# EAGLE board PCB (EAGLE 9.7.0)
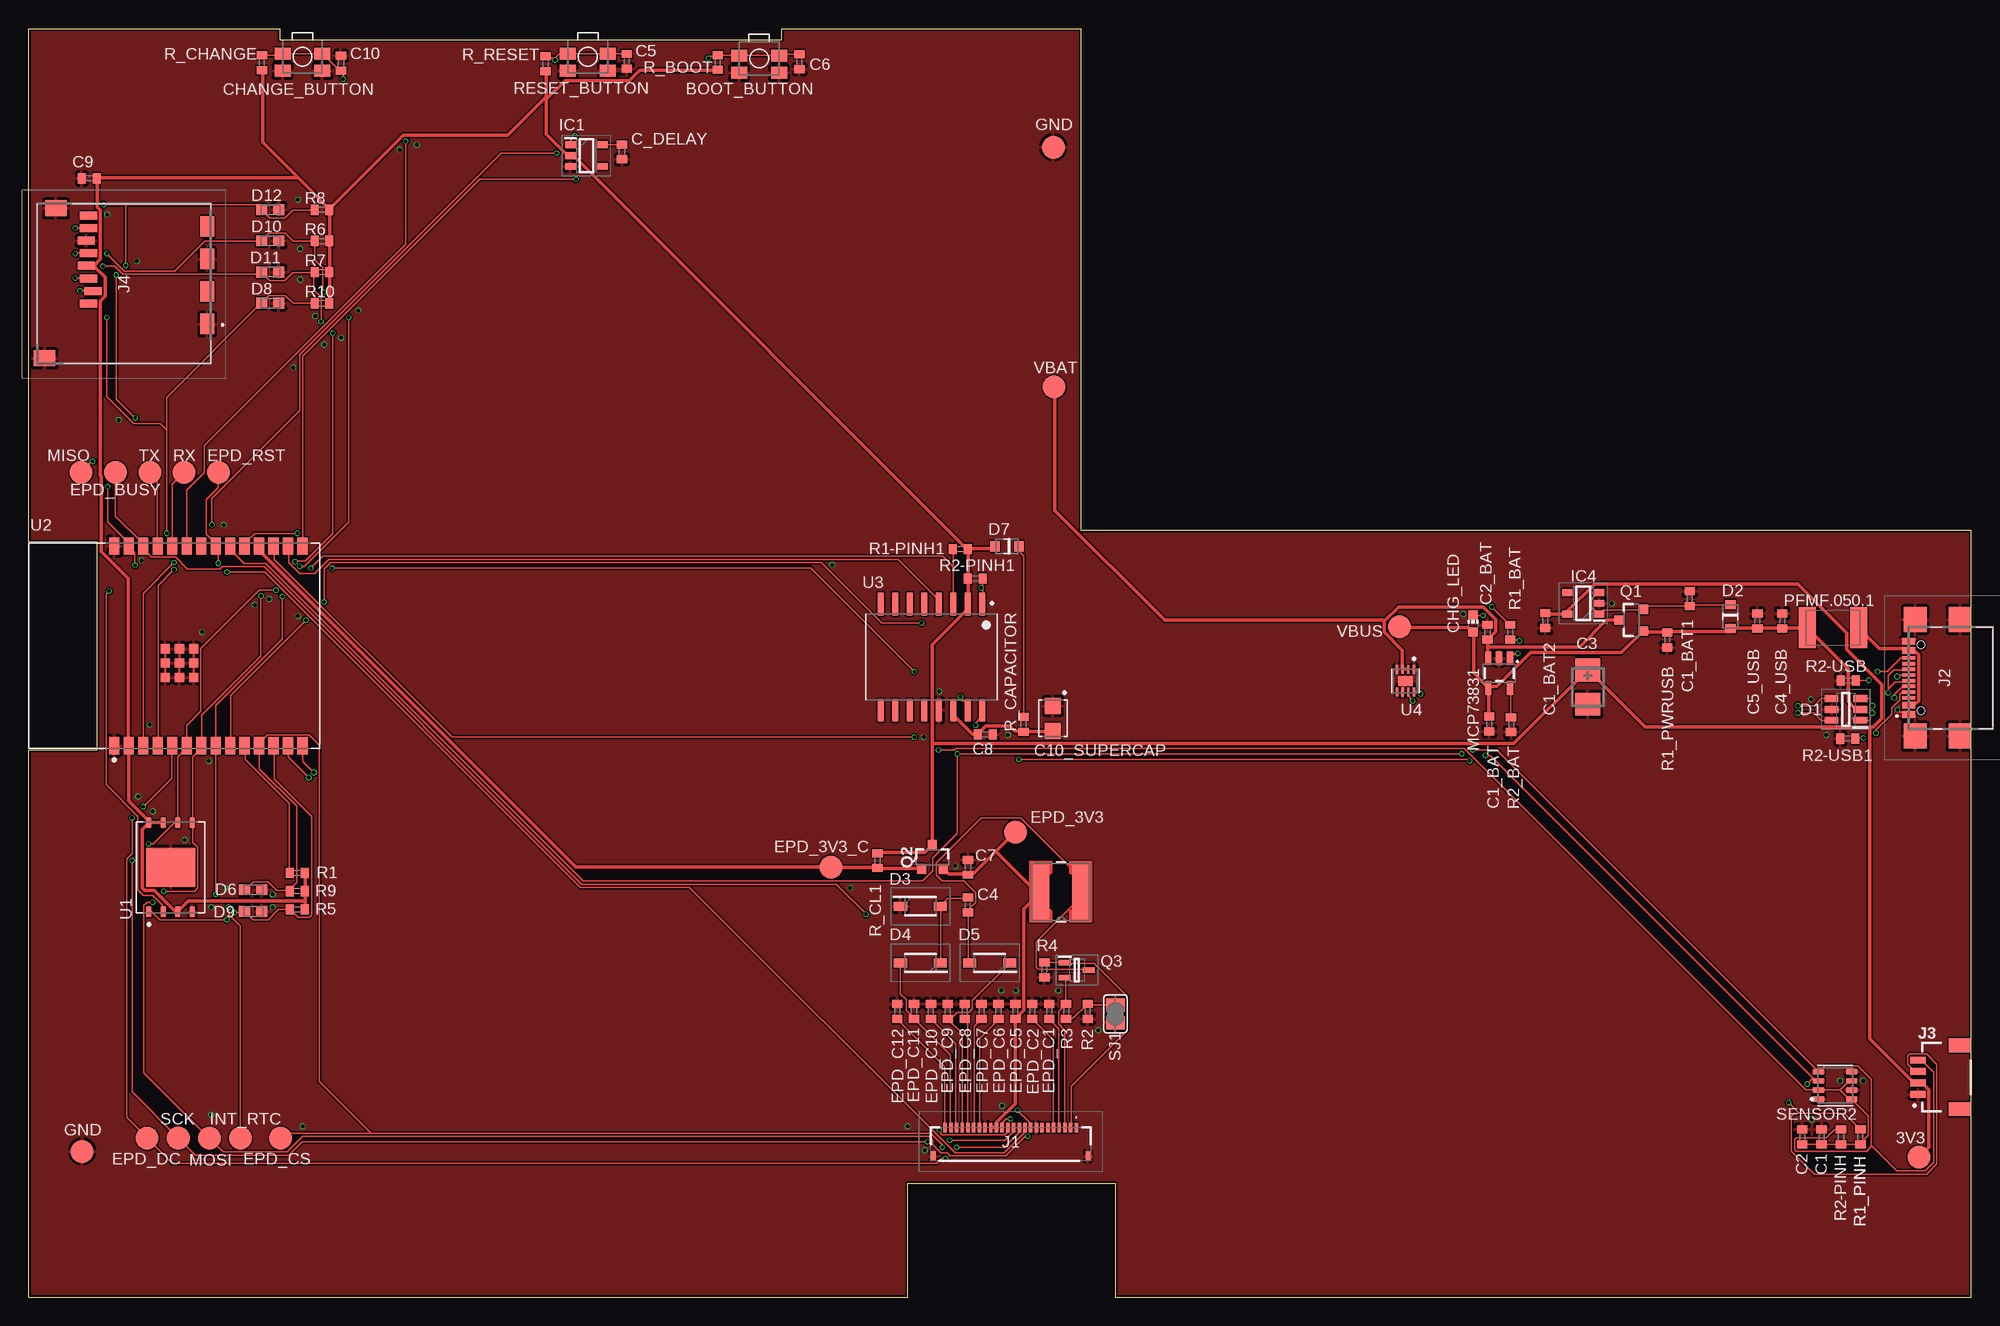
[diagram p0: board, top side]
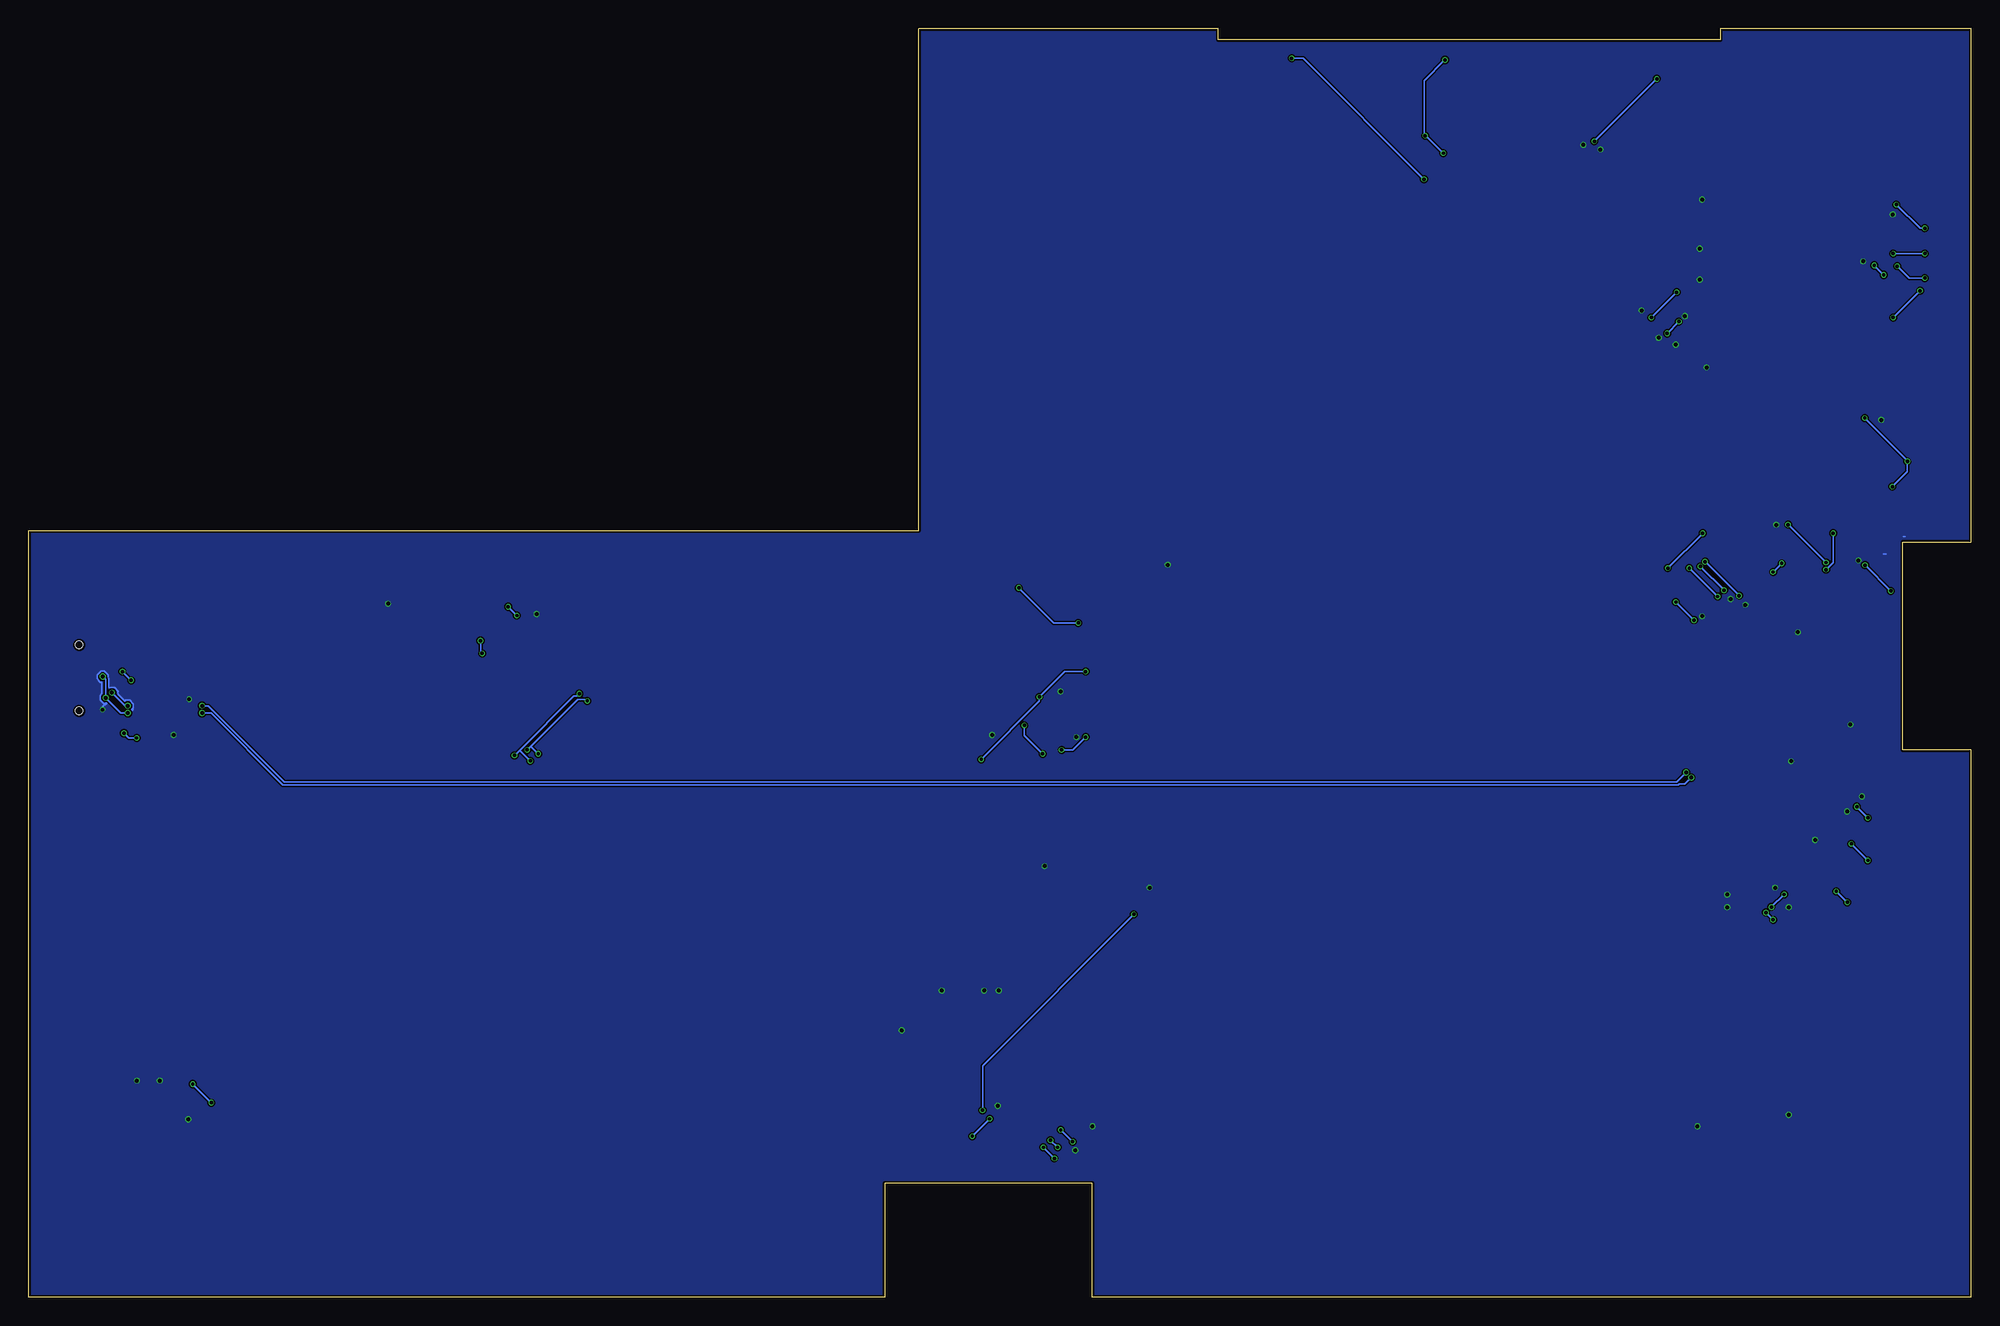
[diagram p1: board, bottom side, seen from below]

Size 170.2 x 111.2 mm. Coordinates in mm from the lower left corner, seen from the top.
Outline: 0,0 77,0 77,10 95.2,10 95.2,0 170.2,0 170.2,67.2 92.2,67.2 92.2,111.2 66,111.2 66,110.2 22,110.2 22,111.2 0,111.2 0,66.2 6,66.2 6,48 0,48 0,0
Copper layers (1*16): Top 0.035mm / dielectric 1.6mm / Bottom 0.035mm
Design rules "jlcpcb-2layers.dru *": minimum track width 0.15mm, minimum drill 0.3mm, track to track 5mil, track to pad 5mil, pad to pad 5mil, via to via 5mil, smd to smd 5mil, copper to edge 0.2mm, drill to drill 6mil, minimum pad ring 10mil, minimum via ring 3mil, stop-mask expansion 4mil, vias tented up to drill 0mil, thermal gap 10mil
Net classes: 1 power: width 0.3 mm

## Footprints (pad centres in the part's own frame; a part is rotated, then mirrored left to right if it is on the bottom)
MYBUTTON = smd 1.4 x 1.05: 1 1.75,1.258; 2 -1.75,1.258; 3 -1.75,-0.242; 4 1.75,-0.242
ESP32_WROVER_EAGLE-LTSPICE_C0402 = smd 0.7 x 0.9: 1 -0.65,0; 2 0.65,0
RCL_CT3528 = smd 2 x 2.2: + -1.5,0; - 1.5,0
CAPCP3225X100N = smd 1.4 x 1.4: 1 -1.1,0; 2 1.1,0
ADAFRUIT_CHIP-LED0603 = smd 0.8 x 0.8: A 0,-0.75; C 0,0.75
SOT95P280X145-6N = smd 1.2 x 0.6: 1 -1.25,0.95; 2 -1.25,0; 3 -1.25,-0.95; 4 1.25,-0.95; 5 1.25,0; 6 1.25,0.95
ESP32_WROVER_AVX---SD0805S020S1R0_AVX_SD0805S020S1R0_0 = smd 0.8 x 0.9: 1 -1.05,0; 2 1.05,0
SOD3716X135N = smd 1.15 x 0.8: 1 -1.75,0; 2 1.75,0
DIOC1608X36N = smd 0.97 x 0.94: 1 -0.75,0; 2 0.75,0
SOT95P280X125-5N = smd 0.9 x 0.6: 1 -1.4,0.95; 2 -1.4,0; 3 -1.4,-0.95; 4 1.4,-0.95; 5 1.4,0.95
SOT95P280X120-5N = smd 0.9 x 0.6: 1 -1.4,0.95; 2 -1.4,0; 3 -1.4,-0.95; 4 1.4,-0.95; 5 1.4,0.95
FH34SRJ24S05SH99 = smd 0.3 x 0.8: 1 5.75,1.45; 2 5.25,1.45; 3 4.75,1.45; 4 4.25,1.45; 5 3.75,1.45; 6 3.25,1.45; 7 2.75,1.45; 8 2.25,1.45; 9 1.75,1.45; 10 1.25,1.45; 11 0.75,1.45; 12 0.25,1.45; 13 -0.25,1.45; 14 -0.75,1.45; 15 -1.25,1.45; 16 -1.75,1.45; 17 -2.25,1.45; 18 -2.75,1.45; 19 -3.25,1.45; 20 -3.75,1.45; 21 -4.25,1.45; 22 -4.75,1.45; 23 -5.25,1.45; 24 -5.75,1.45 | smd 0.4 x 0.8: MP1 6.75,-1.05; MP2 -6.75,-1.05
SAMACSYS_PARTS_USB4110GFA = smd 0.3 x 1.15: A1 -3.35,3.678; A4 -2.55,3.678; A5 -1.25,3.678; A6 -0.25,3.678; A7 0.25,3.678; A8 1.25,3.678; A9 2.55,3.678; A12 3.35,3.678; B1 3.05,3.678; B4 2.25,3.678; B5 1.75,3.678; B6 0.75,3.678; B7 -0.75,3.678; B8 -1.75,3.678; B9 -2.25,3.678; B12 -3.05,3.678 | smd 2.18 x 2: MP1 -5.11,-0.827; MP2 5.11,-0.827; MP3 -5.11,3.103; MP4 5.11,3.103 | hole 0.65: -2.89,2.603; 2.89,2.603
JST04_1MM_RA = smd 0.6 x 1.35: 1 -1.5,0; 2 -0.5,0; 3 0.5,0; 4 1.5,0 | smd 1.2 x 2: NC1 2.8,-3.675; NC2 -2.8,-3.675
112ATAARR03ATTEND = smd 1.8 x 1.2: G1 10.6,10.4; G2 4.9,10.4; S1 7.75,10.4; S2 2.05,10.4 | smd 1.4 x 1.9: G3 13.6,-3.85; G4 0.45,-2.85 | smd 0.7 x 1.5: P1 8.8,0; P2 7.7,0.4; P3 6.6,0; P4 5.5,-0.2; P5 4.4,0; P6 3.3,-0.2; P7 2.2,0; P8 1.1,0
IND_4828-WE-TPC_WRE = smd 1.524 x 5.08: 1 -1.778,0; 2 1.778,0
ESP32_WROVER_SPARKFUN-IC-POWER_SOT23-5 = smd 0.55 x 1.2: 1 -0.95,-1.3; 2 0,-1.3; 3 0.95,-1.3; 4 0.95,1.3; 5 -0.95,1.3
ESP32C6_VARISTOR_CT/CN1812 = smd 1.5 x 3.6: 1 -2.25,0; 2 2.25,0
ESP32_WROVER_SPARKFUN-DISCRETESEMI_SOT23-3 = smd 0.8 x 0.9: 1 -0.95,-1; 2 0.95,-1; 3 0,1.1
SOT65P210X110-3N = smd 1.05 x 0.5: 1 -1.05,0.65; 2 -1.05,-0.65; 3 1.05,0
ESP32_WROVER_EAGLE-LTSPICE_R0402 = smd 0.7 x 0.9: 1 -0.65,0; 2 0.65,0
ESP32_WROVER_BME680_PSON80P300X300X100-8N = smd 1.016 x 0.5: 1 1.458,1.2; 2 1.458,0.4; 3 1.458,-0.4; 4 1.458,-1.2; 5 -1.458,-1.22; 6 -1.458,-0.4; 7 -1.458,0.4; 8 -1.458,1.2
SJ = smd 1.168 x 1.6: 1 -0.762,0; 2 0.762,0
TP20R = smd 2 x 2: TP 0,0
SON127P600X800X80-9N = smd 0.94 x 0.44: 1 -3.895,1.905; 2 -3.895,0.635; 3 -3.895,-0.635; 4 -3.895,-1.905; 5 3.895,-1.905; 6 3.895,-0.635; 7 3.895,0.635; 8 3.895,1.905 | smd 3.4 x 4.3: 9 0,0
XCVR_ESP32-C6-WROOM-1-N8 = smd 1.5 x 0.9: 1 -8.75,5.26; 2 -8.75,3.99; 3 -8.75,2.72; 4 -8.75,1.45; 5 -8.75,0.18; 6 -8.75,-1.09; 7 -8.75,-2.36; 8 -8.75,-3.63; 9 -8.75,-4.9; 10 -8.75,-6.17; 11 -8.75,-7.44; 12 -8.75,-8.71; 13 -8.75,-9.98; 14 -8.75,-11.25; 15 8.75,-11.25; 16 8.75,-9.98; 17 8.75,-8.71; 18 8.75,-7.44; 19 8.75,-6.17; 20 8.75,-4.9; 21 8.75,-3.63; 22 8.75,-2.36; 23 8.75,-1.09; 24 8.75,0.18; 25 8.75,1.45; 26 8.75,2.72; 27 8.75,3.99; 28 8.75,5.26 | smd 0.8 x 0.8: 29_1 -2.755,0.79; 29_2 -1.505,0.79; 29_3 -0.255,0.79; 29_4 -2.755,-0.46; 29_5 -1.505,-0.46; 29_6 -0.255,-0.46; 29_7 -2.755,-1.71; 29_8 -1.505,-1.71; 29_9 -0.255,-1.71
SOIC127P1032X265-16N = smd 2.05 x 0.59: 1 -4.655,4.445; 2 -4.655,3.175; 3 -4.655,1.905; 4 -4.655,0.635; 5 -4.655,-0.635; 6 -4.655,-1.905; 7 -4.655,-3.175; 8 -4.655,-4.445; 9 4.655,-4.445; 10 4.655,-3.175; 11 4.655,-1.905; 12 4.655,-0.635; 13 4.655,0.635; 14 4.655,1.905; 15 4.655,3.175; 16 4.655,4.445
SON50P200X200X80-9N = smd 0.76 x 0.27: 1 -0.985,0.75; 2 -0.985,0.25; 3 -0.985,-0.25; 4 -0.985,-0.75; 5 0.985,-0.75; 6 0.985,-0.25; 7 0.985,0.25; 8 0.985,0.75 | smd 0.9 x 1.3: 9 0,0

## Placement (x,y rotation side)
BOOT_BUTTON  BUTTON_CUSYOMV1  [MYBUTTON]  64,108.58 180 top
C1  100nF  [ESP32_WROVER_EAGLE-LTSPICE_C0402]  157.07,14.07 90 top
C1_BAT  4.7uF  [ESP32_WROVER_EAGLE-LTSPICE_C0402]  127.95,50.25 270 top
C1_BAT1  4.7uF  [ESP32_WROVER_EAGLE-LTSPICE_C0402]  145.53,61.25 90 top
C1_BAT2  4.7uF  [ESP32_WROVER_EAGLE-LTSPICE_C0402]  132.87,59.31 270 top
C2  100nF  [ESP32_WROVER_EAGLE-LTSPICE_C0402]  155.37,14.07 90 top
C2_BAT  4.7uF  [ESP32_WROVER_EAGLE-LTSPICE_C0402]  127.8,58.3 90 top
C3  100uF TANT  [RCL_CT3528]  136.6,53.49 270 top
C4  4.7uF/25V  [ESP32_WROVER_EAGLE-LTSPICE_C0402]  82.29,34.39 270 top
C4_USB  100nF  [ESP32_WROVER_EAGLE-LTSPICE_C0402]  153.63,59.29 90 top
C5  1uF  [ESP32_WROVER_EAGLE-LTSPICE_C0402]  52.41,108.32 270 top
C5_USB  4.7uF  [ESP32_WROVER_EAGLE-LTSPICE_C0402]  151.45,59.29 90 top
C6  100nF  [ESP32_WROVER_EAGLE-LTSPICE_C0402]  67.53,108.28 270 top
C7  10uF  [ESP32_WROVER_EAGLE-LTSPICE_C0402]  82.3,37.7 90 top
C8  100nF  [ESP32_WROVER_EAGLE-LTSPICE_C0402]  83.8,49.33 0 top
C9  100nF  [ESP32_WROVER_EAGLE-LTSPICE_C0402]  5.32,98.07 180 top
C10  100nF  [ESP32_WROVER_EAGLE-LTSPICE_C0402]  27.37,108.16 90 top
C10_SUPERCAP  CPH3225A  [CAPCP3225X100N]  89.74,50.74 270 top
C_DELAY  100nF  [ESP32_WROVER_EAGLE-LTSPICE_C0402]  51.99,100.39 270 top
CHANGE_BUTTON  BUTTON_CUSYOMV1  [MYBUTTON]  24,108.74 180 top
CHG_LED  [ADAFRUIT_CHIP-LED0603]  126.54,59.05 0 top
D1  USBLC6-2SC6Y  [SOT95P280X145-6N]  159.2,51.53 180 top
D2  ESP32_WROVER_AVX---SD0805S020S1R0_AVX_SD0805S020S1R0_0_0AVX_SD0805S020S1R0_0_0  [ESP32_WROVER_AVX---SD0805S020S1R0_AVX_SD0805S020S1R0_0]  149.08,59.66 270 top
D3  MBR0530  [SOD3716X135N]  78.13,34.28 0 top
D4  MBR0530  [SOD3716X135N]  78.13,29.32 180 top
D5  MBR0530  [SOD3716X135N]  84.19,29.32 180 top
D6  PGB1010603MR  [DIOC1608X36N]  19.67,35.73 180 top
D7  ESP32_WROVER_AVX---SD0805S020S1R0_AVX_SD0805S020S1R0_0_0AVX_SD0805S020S1R0_0_0  [ESP32_WROVER_AVX---SD0805S020S1R0_AVX_SD0805S020S1R0_0]  85.71,65.82 180 top
D8  PGB1010603MR  [DIOC1608X36N]  21.17,87.13 180 top
D9  PGB1010603MR  [DIOC1608X36N]  19.67,33.83 180 top
D10  PGB1010603MR  [DIOC1608X36N]  21.17,92.59 180 top
D11  PGB1010603MR  [DIOC1608X36N]  21.17,89.86 180 top
D12  PGB1010603MR  [DIOC1608X36N]  21.17,95.32 180 top
EPD_C1  1uF/50V  [ESP32_WROVER_EAGLE-LTSPICE_C0402]  89.41,25.08 270 top
EPD_C2  1uF/50V  [ESP32_WROVER_EAGLE-LTSPICE_C0402]  87.93,25.08 270 top
EPD_C5  0.1uF/50V  [ESP32_WROVER_EAGLE-LTSPICE_C0402]  86.45,25.08 270 top
EPD_C6  1uF/50V  [ESP32_WROVER_EAGLE-LTSPICE_C0402]  84.97,25.08 270 top
EPD_C7  1uF/50V  [ESP32_WROVER_EAGLE-LTSPICE_C0402]  83.49,25.08 270 top
EPD_C8  1uF/50V  [ESP32_WROVER_EAGLE-LTSPICE_C0402]  82.01,25.08 270 top
EPD_C9  1uF/50V  [ESP32_WROVER_EAGLE-LTSPICE_C0402]  80.53,25.08 270 top
EPD_C10  1uF/50V  [ESP32_WROVER_EAGLE-LTSPICE_C0402]  79.05,25.08 270 top
EPD_C11  1uF/50V  [ESP32_WROVER_EAGLE-LTSPICE_C0402]  77.57,25.08 270 top
EPD_C12  1uF/50V  [ESP32_WROVER_EAGLE-LTSPICE_C0402]  76.09,25.08 270 top
IC1  BD5229G-TR  [SOT95P280X125-5N]  48.87,100.07 0 top
IC4  XC6220A331MR-G  [SOT95P280X120-5N]  136.19,60.83 180 top
J1  FH34SRJ-24S-0.5SH_99_  [FH34SRJ24S05SH99]  86.04,13.44 0 top
J2  SAMACSYS_PARTS_USB4110-GF-A  [SAMACSYS_PARTS_USB4110GFA]  168.37,54.3 90 top
J3  QWIIC_RIGHT_ANGLE  [JST04_1MM_RA]  165.52,19.3 90 top
J4  112A-TAAR-R03_ATTEND  [112ATAARR03ATTEND]  5.25,95.9 270 top
L1  68uH  [IND_4828-WE-TPC_WRE]  90.43,35.55 180 top
MCP73831  ESP32_WROVER_SPARKFUN-IC-POWER_MCP73831  [ESP32_WROVER_SPARKFUN-IC-POWER_SOT23-5]  128.82,54.71 180 top
PFMF.050.1  ESP32C6_VARISTORCN1812  [ESP32C6_VARISTOR_CT/CN1812]  158.06,58.7 180 top
Q1  20V/4.2A/52mΩ/1.4W  [ESP32_WROVER_SPARKFUN-DISCRETESEMI_SOT23-3]  140.44,59.36 90 top
Q2  20V/4.2A/52mΩ/1.4W  [ESP32_WROVER_SPARKFUN-DISCRETESEMI_SOT23-3]  79.18,38.56 0 top
Q3  SI1308EDL-T1-GE3  [SOT65P210X110-3N]  91.84,28.68 0 top
R1  10k  [ESP32_WROVER_EAGLE-LTSPICE_R0402]  23.53,37.21 0 top
R1-PINH1  10k  [ESP32_WROVER_EAGLE-LTSPICE_R0402]  81.63,65.59 0 top
R1_BAT  200  [ESP32_WROVER_EAGLE-LTSPICE_R0402]  129.8,58.3 270 top
R1_PINH  10k  [ESP32_WROVER_EAGLE-LTSPICE_R0402]  160.47,14.07 270 top
R1_PWRUSB  100k  [ESP32_WROVER_EAGLE-LTSPICE_R0402]  143.56,57.62 90 top
R2  2.2  [ESP32_WROVER_EAGLE-LTSPICE_R0402]  92.79,25.08 90 top
R2-PINH  10k  [ESP32_WROVER_EAGLE-LTSPICE_R0402]  158.77,14.07 270 top
R2-PINH1  10k  [ESP32_WROVER_EAGLE-LTSPICE_R0402]  82.93,63.01 180 top
R2-USB  5k1  [ESP32_WROVER_EAGLE-LTSPICE_R0402]  159.4,54.07 180 top
R2-USB1  5k1  [ESP32_WROVER_EAGLE-LTSPICE_R0402]  159.37,48.97 0 top
R2_BAT  2k  [ESP32_WROVER_EAGLE-LTSPICE_R0402]  129.87,50.19 90 top
R3  0.47  [ESP32_WROVER_EAGLE-LTSPICE_R0402]  90.89,25.08 90 top
R4  10k  [ESP32_WROVER_EAGLE-LTSPICE_R0402]  88.99,28.72 90 top
R5  10k  [ESP32_WROVER_EAGLE-LTSPICE_R0402]  23.53,34.01 0 top
R6  10k  [ESP32_WROVER_EAGLE-LTSPICE_R0402]  25.71,92.58 0 top
R7  10k  [ESP32_WROVER_EAGLE-LTSPICE_R0402]  25.71,89.84 0 top
R8  10k  [ESP32_WROVER_EAGLE-LTSPICE_R0402]  25.71,95.31 0 top
R9  10k  [ESP32_WROVER_EAGLE-LTSPICE_R0402]  23.53,35.61 0 top
R10  10k  [ESP32_WROVER_EAGLE-LTSPICE_R0402]  25.71,87.11 0 top
R_BOOT  10k  [ESP32_WROVER_EAGLE-LTSPICE_R0402]  60.37,108.22 270 top
R_CAPACITOR  15  [ESP32_WROVER_EAGLE-LTSPICE_R0402]  87.16,50.22 90 top
R_CHANGE  10k  [ESP32_WROVER_EAGLE-LTSPICE_R0402]  20.44,108.21 270 top
R_CL1  10k  [ESP32_WROVER_EAGLE-LTSPICE_R0402]  74.37,38.28 90 top
R_RESET  10k  [ESP32_WROVER_EAGLE-LTSPICE_R0402]  45.29,108.11 270 top
RESET_BUTTON  BUTTON_CUSYOMV1  [MYBUTTON]  49,108.74 180 top
SENSOR2  ESP32_WROVER_BME680_BME680  [ESP32_WROVER_BME680_PSON80P300X300X100-8N]  158.26,18.58 180 top
SJ1  [SJ]  95.21,24.85 90 top
TP1  TPTP20R  [TP20R]  10.62,72.29 0 top
TP2  TPTP20R  [TP20R]  13.63,72.29 0 top
TP3  TPTP20R  [TP20R]  89.85,79.79 0 top
TP4  TPTP20R  [TP20R]  89.77,100.79 0 top
TP5  TPTP20R  [TP20R]  4.69,12.79 0 top
TP6  TPTP20R  [TP20R]  4.61,72.29 0 top
TP7  TPTP20R  [TP20R]  15.84,13.95 0 top
TP8  TPTP20R  [TP20R]  13.12,13.95 0 top
TP9  TPTP20R  [TP20R]  7.62,72.29 0 top
TP10  TPTP20R  [TP20R]  22.09,13.95 0 top
TP11  TPTP20R  [TP20R]  10.39,13.95 0 top
TP12  TPTP20R  [TP20R]  16.64,72.29 0 top
TP13  TPTP20R  [TP20R]  70.29,37.71 0 top
TP14  TPTP20R  [TP20R]  120.09,58.79 0 top
TP15  TPTP20R  [TP20R]  18.57,13.95 0 top
TP16  TPTP20R  [TP20R]  165.59,12.29 0 top
TP17  TPTP20R  [TP20R]  86.44,40.79 0 top
U1  W25Q512JVEIQ  [SON127P600X800X80-9N]  12.44,37.69 90 top
U2  ESP32-C6-WROOM-1-N8  [XCVR_ESP32-C6-WROOM-1-N8]  12.76,57.1 90 top
U3  DS3231SN#  [SOIC127P1032X265-16N]  79.1,56.12 270 top
U4  MAX17048G+T10  [SON50P200X200X80-9N]  120.62,54.03 270 top

## Library data of the parts
BOOT_BUTTON CHANGE_BUTTON CHG_LED PFMF.050.1 RESET_BUTTON SJ1 TP1-TP17 = tsc-good-lib
C1 C1_BAT C1_BAT1 C1_BAT2 C2 C2_BAT C4 C4_USB C5 C5_USB C6-C10 C_DELAY EPD_C1 EPD_C2 EPD_C5-EPD_C12 = tsc-good-lib; SPICEMODEL: NONE; SPICEPREFIX: C
C3 = tsc-good-lib; SPICEPREFIX: C
C10_SUPERCAP = tsc-good-lib; AVAILABILITY: Not in stock; CHECK_PRICES: https://www.snapeda.com/parts/CPH3225A/Seiko+Instruments/view-part/?ref=eda; DESCRIPTION: 11 mF (EDLC) Supercapacitor 3.3 V 1210 (3225 Metric) - -; MF: Seiko Instruments; MP: CPH3225A; PACKAGE: 1210 Seiko; PRICE: None; PURCHASE-URL: https://www.snapeda.com/api/url_track_click_mouser/?unipart_id=562593&manufacturer=Seiko Instruments&part_name=CPH3225A&search_term=None; SNAPEDA_LINK: https://www.snapeda.com/parts/CPH3225A/Seiko+Instruments/view-part/?ref=snap
D1 = tsc-good-lib; AVAILABILITY: In Stock; CHECK_PRICES: https://www.snapeda.com/parts/USBLC6-2SC6Y/STMicroelectronics/view-part/?ref=eda; DESCRIPTION: 17V Clamp 5A (8/20µs) Ipp Tvs Diode Surface Mount SOT-23-6; MF: STMicroelectronics; MP: USBLC6-2SC6Y; PACKAGE: SOT-23-6 STMicroelectronics; PRICE: None; SNAPEDA_LINK: https://www.snapeda.com/parts/USBLC6-2SC6Y/STMicroelectronics/view-part/?ref=snap
D2 D7 = tsc-good-lib; CENTROID_NOT_SPECIFIED: No; DATASHEET: http://datasheets.avx.com/schottky.pdf; DIGIKEY_DESCRIPTION: DIODE SCHOTTKY 20V 1A 0805; DIGIKEY_PART_NUMBER: 478-7800-1-ND; LEAD_FREE: yes; MF: AVX; MOUSER_PART_NUMBER: 581-SD0805S020S1R0; PACKAGE: 0805 (2012 metric); PREFIX: D; ROHS: yes; TEMPERATURE_RANGE_HIGH: +125°C; TEMPERATURE_RANGE_LOW: -55°C
D3-D5 = tsc-good-lib; AVAILABILITY: In Stock; CHECK_PRICES: https://www.snapeda.com/parts/MBR0530/Onsemi/view-part/?ref=eda; DESCRIPTION: Diode Schottky 30 V 500mA Surface Mount SOD-123; MF: ON Semiconductor; MP: MBR0530; PACKAGE: SOD-123-2 ON Semiconductor; PRICE: None; PURCHASE-URL: https://www.snapeda.com/api/url_track_click_mouser/?unipart_id=179458&manufacturer=ON Semiconductor&part_name=MBR0530&search_term=None; SNAPEDA_LINK: https://www.snapeda.com/parts/MBR0530/Onsemi/view-part/?ref=snap
D6 D8-D12 = tsc-good-lib; AVAILABILITY: In Stock; CHECK_PRICES: https://www.snapeda.com/parts/PGB1010603MR/Littelfuse/view-part/?ref=eda; DESCRIPTION: 150V (Typ) Clamp - Ipp Tvs Diode Surface Mount 0603 (1608 Metric); MF: Littelfuse Inc.; MP: PGB1010603MR; PACKAGE: 0603 Littelfuse Inc.; PRICE: None; PURCHASE-URL: https://www.snapeda.com/api/url_track_click_mouser/?unipart_id=5659453&manufacturer=Littelfuse Inc.&part_name=PGB1010603MR&search_term=None; SNAPEDA_LINK: https://www.snapeda.com/parts/PGB1010603MR/Littelfuse/view-part/?ref=snap
IC1 = tsc-good-lib; DESCRIPTION: Voltage Detector with Adjustable Delay Time: CMOS processes are utilized to develop high precision, low current consumption CMOS reset ICs that allow arbitrary setting of the delay time. The extensive lineup includes both Nch Open Drain and CMOS output types in a wide range of detection voltages (from 2.3V to 6.0V, in 0.1V steps), enabling selection of the ideal solution based on customer requirements. In addition, the entire series is of course both lead-free and RoHS-compliant.; HEIGHT: 1.25mm; MANUFACTURER_NAME: ROHM Semiconductor; MANUFACTURER_PART_NUMBER: BD5229G-TR; MOUSER_PART_NUMBER: 755-BD5229G-TR; MOUSER_PRICE-STOCK: https://www.mouser.co.uk/ProductDetail/ROHM-Semiconductor/BD5229G-TR?qs=4kLU8WoGk0vvnhrrYwdszw%3D%3D
IC4 = tsc-good-lib; DESCRIPTION: LDO Voltage Regulators; HEIGHT: 1.2mm; MANUFACTURER_NAME: Torex; MANUFACTURER_PART_NUMBER: XC6220A331MR-G; MOUSER_PART_NUMBER: 865-XC6220A331MR-G; MOUSER_PRICE-STOCK: https://www.mouser.co.uk/ProductDetail/Torex-Semiconductor/XC6220A331MR-G?qs=AsjdqWjXhJ8ZSWznL1J0gg%3D%3D
J1 = tsc-good-lib; DESCRIPTION: 24 Position FFC, FPC Connector Contacts, Top and Bottom 0.020" (0.50mm) Surface Mount, Right Angle; HEIGHT: 1.1mm; MANUFACTURER_NAME: Hirose; MANUFACTURER_PART_NUMBER: FH34SRJ-24S-0.5SH(99); MOUSER_PART_NUMBER: 798-FH34SRJ24S05SH99; MOUSER_PRICE-STOCK: https://www.mouser.co.uk/ProductDetail/Hirose-Connector/FH34SRJ-24S-0.5SH99?qs=vcbW%252B4%252BSTIpKBl5ap9J8Fw%3D%3D
J2 = tsc-good-lib; DESCRIPTION: CONN USB 2.0 TYPE-C R/A SMT; HEIGHT: 3.26mm; MANUFACTURER_NAME: GCT (GLOBAL CONNECTOR TECHNOLOGY); MANUFACTURER_PART_NUMBER: USB4110-GF-A; MOUSER_PART_NUMBER: 640-USB4110-GF-A; MOUSER_PRICE-STOCK: https://www.mouser.co.uk/ProductDetail/GCT/USB4110-GF-A?qs=KUoIvG%2F9IlYiZvIXQjyJeA%3D%3D
J3 = tsc-good-lib; PROD_ID: CONN-13694
J4 = tsc-good-lib; DESCRIPTION: Micro SD Card Socket, Push-Push Type, Top Mount, SMT, H=1.83mm, 10u; HEIGHT: 1.9mm; MANUFACTURER_NAME: ATTEND; MANUFACTURER_PART_NUMBER: 112A-TAAR-R03 ATTEND
L1 = tsc-good-lib; COPYRIGHT: Copyright (C) 2024 Ultra Librarian. All rights reserved.; CUSTOM_VAL: 68uH; MANUFACTURER_PART_NUMBER: 744043680; MFR_NAME: Wurth Electronics
MCP73831 = tsc-good-lib; PROD_ID: IC-09995
Q1 Q2 = tsc-good-lib; PROD_ID: TRAN-14388
Q3 = tsc-good-lib; AVAILABILITY: In Stock; CHECK_PRICES: https://www.snapeda.com/parts/SI1308EDL-T1-GE3/Vishay+Siliconix/view-part/?ref=eda; DESCRIPTION: Si1308EDL-T1-GE3 N-channel MOSFET Transistor, 1.5 A, 30 V, 3-Pin SC-70 | Siliconix / Vishay SI1308EDL-T1-GE3; MF: Vishay Siliconix; MP: SI1308EDL-T1-GE3; PACKAGE: SOT-323 Vishay Semiconductor; PRICE: None; PURCHASE-URL: https://www.snapeda.com/api/url_track_click_mouser/?unipart_id=274603&manufacturer=Vishay Siliconix&part_name=SI1308EDL-T1-GE3&search_term=None; SNAPEDA_LINK: https://www.snapeda.com/parts/SI1308EDL-T1-GE3/Vishay+Siliconix/view-part/?ref=snap
R1 R1-PINH1 R1_BAT R1_PINH R1_PWRUSB R2 R2-PINH R2-PINH1 R2-USB R2-USB1 R2_BAT R3-R10 R_BOOT R_CAPACITOR R_CHANGE R_CL1 R_RESET = tsc-good-lib; SPICEMODEL: NONE; SPICEPREFIX: R
SENSOR2 = tsc-good-lib; AVAILABILITY: Unavailable; DESCRIPTION: Integrated Environmental Unit; MF: Bosch Sensortec; MP: BME680; PACKAGE: LGA-8 Bosch Tools; PRICE: None
U1 = tsc-good-lib; AVAILABILITY: In Stock; CHECK_PRICES: https://www.snapeda.com/parts/W25Q512JVEIQ/Winbond+Electronics/view-part/?ref=eda; DESCRIPTION: FLASH - NOR Memory IC 512Mb (64M x 8) SPI - Quad I/O 133 MHz 8-WSON (8x6); MF: Winbond Electronics; MP: W25Q512JVEIQ; PACKAGE: Package; PRICE: None; SNAPEDA_LINK: https://www.snapeda.com/parts/W25Q512JVEIQ/Winbond+Electronics/view-part/?ref=snap
U2 = tsc-good-lib; AVAILABILITY: In Stock; CHECK_PRICES: https://www.snapeda.com/parts/ESP32-C6-WROOM-1-N8/Espressif+Systems/view-part/?ref=eda; DESCRIPTION: Multiprotocol Modules ESP32-C6 module, Wi-Fi 6 in 2.4 GHz band, Bluetooth 5, Zigbee 3.0 and Thread. ESP34-WROOM Compatible - ENGINEERING SAMPLE; MF: Espressif Systems; MP: ESP32-C6-WROOM-1-N8; PACKAGE: None; PRICE: None; SNAPEDA_LINK: https://www.snapeda.com/parts/ESP32-C6-WROOM-1-N8/Espressif+Systems/view-part/?ref=snap
U3 = tsc-good-lib; AVAILABILITY: In Stock; CHECK_PRICES: https://www.snapeda.com/parts/DS3231SN%23/Analog+Devices/view-part/?ref=eda; DESCRIPTION: Extremely Accurate I²C-Integrated RTC/TCXO/Crystal; MF: Analog Devices; MP: DS3231SN#; PACKAGE: SOIC-16 Maxim; PRICE: None; PURCHASE-URL: https://www.snapeda.com/api/url_track_click_mouser/?unipart_id=99048&manufacturer=Analog Devices&part_name=DS3231SN#&search_term=None; SNAPEDA_LINK: https://www.snapeda.com/parts/DS3231SN%23/Analog+Devices/view-part/?ref=snap
U4 = tsc-good-lib; AVAILABILITY: In Stock; CHECK_PRICES: https://www.snapeda.com/parts/MAX17048G+T10/Analog+Devices/view-part/?ref=eda; DESCRIPTION: 3µA 1-Cell/2-Cell Fuel Gauge with ModelGauge; MF: Analog Devices; MP: MAX17048G+T10; PACKAGE: TDFN-8 Maxim; PRICE: None; PURCHASE-URL: https://www.snapeda.com/api/url_track_click_mouser/?unipart_id=329239&manufacturer=Analog Devices&part_name=MAX17048G+T10&search_term=None; SNAPEDA_LINK: https://www.snapeda.com/parts/MAX17048G+T10/Analog+Devices/view-part/?ref=snap

## Nets
3V3 [power]: C1_BAT2.1 C3.+ C9.1 D7.2 IC1.2 IC4.5 J3.2 J4.P4 Q2.3 R1-PINH1.2 R1.2 R2-PINH1.2 R5.2 R6.2 R7.2 R8.2 R9.2 R10.2 R_BOOT.2 R_CHANGE.2 R_CL1.2 R_RESET.2 TP16.TP U1.3 U1.7 U1.8 U2.2 U3.2
32KHZ: R2-PINH1.1 U2.9 U3.1
D_N: D1.1 J2.A7 J2.B7
D_P: D1.3 J2.A6 J2.B6
EPD_3V3 [power]: C7.1 EPD_C5.2 J1.15 J1.16 L1.2 Q2.2 TP17.TP
EPD_3V3_C [power]: Q2.1 R_CL1.1 TP13.TP U2.18
EPD_BUSY: J1.9 TP9.TP U2.26
EPD_CS: D6.2 J1.12 R9.1 TP10.TP U2.11
EPD_DC: J1.11 TP11.TP U2.5
EPD_RST: J1.10 TP12.TP U2.21
FLASH_CS: D9.2 R5.1 U1.1 U2.12
GDR: J1.2 Q3.1 R4.2
GND: BOOT_BUTTON.1 BOOT_BUTTON.2 C1.2 C1_BAT1.2 C1_BAT2.2 C1_BAT.2 C2.2 C2_BAT.2 C3.- C4_USB.2 C5.2 C5_USB.2 C6.2 C7.2 C8.2 C9.2 C10.2 C10_SUPERCAP.1 C_DELAY.2 CHANGE_BUTTON.1 CHANGE_BUTTON.2 D1.5 D3.1 D6.1 D8.1 D9.1 D10.1 D11.1 D12.1 EPD_C1.1 EPD_C2.1 EPD_C5.1 EPD_C6.1 EPD_C7.1 EPD_C8.1 EPD_C9.1 EPD_C10.1 EPD_C11.1 EPD_C12.1 IC1.3 IC4.2 J1.8 J1.17 J1.MP1 J1.MP2 J2.A1 J2.A12 J2.B1 J2.B12 J2.MP1 J2.MP2 J2.MP3 J2.MP4 J3.1 J4.G1 J4.G2 J4.G3 J4.G4 J4.P6 MCP73831.2 R1_PWRUSB.1 R2-USB1.1 R2-USB.2 R2.1 R2_BAT.1 R4.1 RESET_BUTTON.1 RESET_BUTTON.2 SENSOR2.1 SENSOR2.5 SENSOR2.7 SJ1.1 TP4.TP TP5.TP U1.4 U1.9 U2.1 U2.28 U2.29_1 U2.29_2 U2.29_3 U2.29_4 U2.29_5 U2.29_6 U2.29_7 U2.29_8 U2.29_9 U3.13 U4.1 U4.4 U4.6 U4.9
GPIO8: R1.1 U2.10
I2C_PW: C1.1 C2.1 R1_PINH.2 R2-PINH.2 SENSOR2.2 SENSOR2.6 SENSOR2.8 U2.17
INT_RTC: R1-PINH1.1 TP15.TP U2.8 U3.3
IO/BOOT: BOOT_BUTTON.3 BOOT_BUTTON.4 C6.1 R_BOOT.1 U2.15
IO/CHANGE: C10.1 CHANGE_BUTTON.3 CHANGE_BUTTON.4 R_CHANGE.1 U2.23
MISO: D12.2 J4.P7 R8.1 TP6.TP U1.2 U2.27
MOSI: D11.2 J1.14 J4.P3 R7.1 TP7.TP U1.5 U2.7
N$1: J2.A5 R2-USB1.2
N$2: C1_BAT1.1 D2.1 IC4.1 IC4.3 Q1.2
N$3: C_DELAY.1 IC1.5
N$5: C4.1 D3.2 D4.1
N$6: MCP73831.1 R1_BAT.2
N$7: CHG_LED.C R1_BAT.1
N$8: MCP73831.5 R2_BAT.2
N$9: J2.B5 R2-USB.1
N$10: EPD_C1.2 J1.4
N$11: EPD_C2.2 J1.5
N$17: D7.1 R_CAPACITOR.2
N$20: EPD_C6.2 J1.18
N$21: EPD_C7.2 J1.19
N$22: EPD_C8.2 J1.20
N$24: EPD_C10.2 J1.22
N$26: EPD_C12.2 J1.24
PREVGH: D5.1 EPD_C9.2 J1.21
PREVGL: D4.2 EPD_C11.2 J1.23
RESE: J1.3 Q3.2 R3.2
RESE': R2.2 R3.1 SJ1.2
RESET: C5.1 IC1.1 R_RESET.1 RESET_BUTTON.3 RESET_BUTTON.4 U2.3
RTC_RST: U2.16 U3.4
RX: TP2.TP U2.24
SCK: D10.2 J1.13 J4.P5 R6.1 TP8.TP U1.6 U2.6
SCL: J3.4 R2-PINH.1 SENSOR2.4 U2.20 U3.16 U4.7
SDA: J3.3 R1_PINH.1 SENSOR2.3 U2.19 U3.15 U4.8
SRC: C4.2 D5.2 L1.1 Q3.3
SS_SD: D8.2 J4.P2 R10.1 U2.4
TX: TP1.TP U2.25
USB_D+_N: D1.6 U2.13
USB_D+_P: D1.4 U2.14
VBAT [power]: C2_BAT.1 MCP73831.3 Q1.3 TP3.TP U4.2 U4.3
VBUS [power]: C1_BAT.1 C4_USB.1 C5_USB.1 CHG_LED.A D1.2 D2.2 MCP73831.4 PFMF.050.1.2 Q1.1 R1_PWRUSB.2 TP14.TP
VRTC [power]: C8.1 C10_SUPERCAP.2 R_CAPACITOR.1 U3.14
VUSB [power]: J2.A4 J2.A9 J2.B4 J2.B9 PFMF.050.1.1

## Tracks (layer width: path | path; a pad name or v marks a point on that pad's centre or on a via)
3V3
  Top 0.3: TP16.TP 165.65,12.33 166.48,13.16 166.48,18.21 165.92,18.77 165.58,18.77 J3.2 165.37,18.84 165.09,18.84 161.28,22.64 161.28,49.86 161.21,50 | C1_BAT2.1 132.89,59.9 134.76,59.9 IC4.5 134.83,60.04 134.83,60.18 137.18,62.53 154.98,62.53 159.28,58.24 159.28,56.79 162.35,53.72 162.35,50.74 161.61,50 161.21,50 | 161.21,50 141.62,50 136.63,54.98 C3.+ 136.49,54.91 130.12,48.54 79.15,48.54 | R_CL1.2 74.37,38.99 78.53,38.99 79.15,39.61 Q2.3 79.15,39.75 79.15,48.54 | R1-PINH1.2 82.34,65.65 84.48,65.65 84.62,65.79 D7.2 | R1-PINH1.2 82.34,65.44 82.34,63.16 R2-PINH1.2 82.34,62.95 82.34,60.8 U3.2 82.2,60.66 82.2,60.25 79.15,57.2 79.15,48.54 | 24.24,34.76 24.24,35.59 R9.2 24.24,35.73 24.24,37.19 R1.2 | 24.24,34.76 24.24,34.07 R5.2 | U1.8 10.6,41.62 11.77,41.62 U1.7 | U1.8 10.46,41.48 9.97,41 9.97,35.87 10.18,35.66 11.01,35.66 12.81,33.86 13.02,33.86 U1.3 13.16,33.93 13.99,34.76 24.24,34.76 | U1.8 10.53,41.76 8.79,43.49 8.79,48.34 U2.2 8.73,48.48 8.73,63.02 6.37,65.37 6.37,71.95 6.3,72.02 6.3,87.32 6.72,87.74 6.72,89.4 5.82,90.3 5.75,90.44 | 45.36,105 45.36,105.22 42,101.87 32.83,101.87 26.45,95.5 R8.2 | 45.36,105 45.36,104.22 45.36,101.94 47.16,100.14 47.44,100.14 IC1.2 47.58,100 47.78,100 82.13,65.65 R1-PINH1.2 | 45.36,105 45.36,107.41 R_RESET.2 | R_BOOT.2 60.32,107.55 53.53,107.55 52.63,106.64 47,106.64 45.36,105 | 5.75,90.44 6.3,91 6.3,95.29 6.03,95.56 6.03,98.06 C9.1 6.16,98.13 23.61,98.13 | 5.75,90.44 5.05,90.44 J4.P4 | R10.2 26.38,87.12 26.38,89.82 R7.2 26.38,89.96 26.38,92.52 R6.2 26.38,92.73 26.38,95.29 R8.2 | 23.61,98.13 26.32,95.43 R8.2
  Top 0.3: 23.61,98.13 20.5,101.24 20.5,107.55 R_CHANGE.2
32KHZ  (via drill 0.3)
  Top 0.15: 83.58,62.19 83.58,60.8 U3.1 | 83.58,62.19 83.58,62.95 R2-PINH1.1 | v24.31,59.35 17.73,52.77 17.73,48.41 U2.9 | v25.9,60.94 25.9,63.85 26.45,64.4 69.46,64.4 74.74,59.12 v78.24,59.12 | v83.45,62.19 83.58,62.19
  Bottom 0.15: v25.9,60.94 v24.31,59.35 | v78.24,59.12 80.38,59.12 v83.45,62.19
D_N  (via drill 0.35)
  Top 0.15: D1.1 161.35,50.58 161.35,51.06 v161.5,51.22 | J2.B7 164.16,53.55 163.44,52.83 v163.44,52.55 | v163.71,54.41 163.85,54.55 J2.A7
  Bottom 0.15: v161.5,51.22 162.1,51.22 v163.44,52.55 163.44,54.14 v163.71,54.41
D_P  (via drill 0.35)
  Top 0.15: D1.3 161.35,52.48 161.35,51.99 v161.5,51.84 | J2.A6 164.56,53.92 163.52,53.92 162.9,53.3 | 162.9,53.3 v162.9,53 | J2.B6 164.65,55 163.4,55 162.9,54.5 162.9,53.3
  Bottom 0.15: v161.5,51.84 161.75,51.84 v162.9,53
EPD_3V3
  Top 0.3: Q2.2 80.19,37.53 80.61,37.12 82.27,37.12 C7.1 82.41,37.19 82.82,37.19 84.73,39.09 | 84.73,39.09 86.42,40.79 TP17.TP | J1.16 84.35,14.89 84.76,14.89 J1.15 84.83,15.03 84.83,15.37 86.42,16.97 86.42,24.38 EPD_C5.2 86.56,24.52 87.19,25.14 87.19,34.07 88.64,35.52 L1.2 88.36,35.46 84.73,39.09
EPD_3V3_C
  Top 0.3: Q2.1 78.18,37.6 74.37,37.6 R_CL1.1 74.24,37.67 70.43,37.67 TP13.TP 70.29,37.74 47.92,37.74 20.22,65.44 20.22,65.79 U2.18
EPD_BUSY  (via drill 0.3)
  Top 0.15: v86.63,16.41 87.74,15.3 87.74,14.96 J1.9 | TP9.TP 7.62,68.49 9.97,66.13 9.97,65.86 U2.26 10.04,65.79 10.04,65.58 10.73,64.89 12.88,64.89 13.92,63.85 16.76,63.85 16.97,64.06 20.64,64.06 48.48,36.22 70.77,36.22 73.37,33.62 v73.37,33.57
  Bottom 0.15: v86.63,16.41 86.63,20.31 v73.37,33.57
EPD_CS  (via drill 0.3)
  Top 0.15: D6.2 18.97,35.73 19.67,36.42 20.98,36.42 21.74,35.66 22.85,35.66 R9.1 22.85,35.73 23.48,36.36 23.48,43.07 20.22,46.33 20.22,48.34 U2.11 20.22,48.41 20.22,48.61 20.91,49.31 24.58,49.31 25.48,48.41 25.48,18.92 30,14.4 | v80.68,13.78 85.52,13.78 86.28,14.54 J1.12 | v80.05,13.16 80.05,13.37 79.01,14.4 30,14.4 | 30,14.4 22.51,14.4 22.09,13.99 TP10.TP
  Bottom 0.15: v80.05,13.16 v80.68,13.78
EPD_DC  (via drill 0.3)
  Top 0.15: v81.3,13.16 85.45,13.16 86.77,14.47 86.77,14.89 J1.11 | v80.33,12.19 79.98,12.19 79.57,11.77 12.6,11.77 10.46,13.92 TP11.TP 10.39,13.99 8.59,15.79 8.59,38.43 9.07,38.92 v9.07,42.03 | v10.04,43 12.53,45.5 12.53,48.34 U2.5
  Bottom 0.15: v80.33,12.19 v81.3,13.16 | v9.07,42.03 v10.04,43
EPD_RST  (via drill 0.3)
  Top 0.15: v17.38,63.57 20.71,63.57 48.34,35.94 57.89,35.94 81.16,12.67 85.45,12.67 87.25,14.47 87.25,14.89 J1.10 | v16.62,64.33 16.62,65.58 16.41,65.79 U2.21 16.34,65.86 16.34,66.13 15.58,66.89 15.58,69.94 16.62,70.98 16.62,72.23 TP12.TP
  Bottom 0.15: v16.62,64.33 v17.38,63.57
FLASH_CS  (via drill 0.3)
  Top 0.15: v17.38,33.1 11.49,33.1 10.8,33.79 10.6,33.79 U1.1 | v18,33.73 18.97,33.73 D9.2 18.97,33.79 19.67,33.1 20.98,33.1 21.88,34 22.85,34 R5.1 22.92,34 23.61,33.31 24.58,33.31 24.79,33.52 24.79,42.17 21.54,45.43 21.54,48.34 U2.12
  Bottom 0.15: v18,33.73 v17.38,33.1
GDR
  Top 0.15: J1.2 91.34,14.96 91.34,18.49 96.26,23.41 96.26,26.38 93.35,29.29 90.86,29.29 Q3.1 90.79,29.36 89.06,29.36 R4.2
GND  (via drill 0.3, 0.35)
  Top 0.15: U2.29_6 13.23,56.78 13.23,55.61 U2.29_5 U2.29_4 | v163.71,51.52 163.91,51.31 164.68,51.31 J2.B12 | D1.5 | U2.29_3 U2.29_2 U2.29_1 | U2.29_9 U2.29_8 U2.29_7
  Bottom 0.15: v163.71,51.52 163.71,51.8 163.43,52.08 163.36,52.08 163.36,52.01 163.43,52.01 163.5,51.94 163.91,52.35 163.91,52.77 163.78,52.91 163.78,53.95 163.84,53.95 163.84,53.88 163.91,53.88 164.05,54.02 164.05,54.08 164.19,54.22 164.19,54.57 163.84,54.91 163.57,54.91 163.22,54.57 163.22,54.36 163.15,54.29 163.15,53.46 162.67,53.46 162.32,53.12 162.39,53.05 162.39,52.91 162.32,52.91 162.32,52.84 161.77,52.28 161.7,52.35 161.35,52.35 161.01,52.01 161.01,51.66 161.15,51.52 161.08,51.45 161.01,51.52 | 5.96,66.69 5.82,66.69 | 7.73,65.16 7.48,65.16
  other vias: 156.13,52.42 77,15 24,15 16,16 78.4,49.1 28.9,86.5 32.5,100.6 34,101 17.1,67.7 25.9,83.5 9.5,90.8 6.9,94.9 7.9,76.9 19.8,60.7 15.2,58.3 25.1,86 21.4,34.2 16,34.2 21.4,35.3 81.2,37.8 72,35.9 9.9,64.6 157.5,49.3 23.8,91.9 23.8,89.2 23.6,96.2 85.3,16.8 78.5,12.9 13.7,40.1 138.7,60.8 93.7,23.4 90.2,26.9 86.5,26.9 85.2,26.9 160.7,19 158.7,19 156.2,15.6 125.7,59.9 85.8,49.3 79.8,53.1 70.4,64.2 17.2,35.9 10.9,42.6 9.6,43.9 15.8,47 10.6,50.2 21.1,61.2 23.6,59.7 23.2,81.5 27.4,84.1
  pour Top: 6.06,47.96 6.04,47.94 6.02,47.92 0.08,47.92 0.08,0.08 76.92,0.08 76.92,10.02 76.94,10.04 76.96,10.06 76.98,10.08 95.22,10.08 95.24,10.06 95.26,10.04 95.28,10.02 95.28,0.08 170.12,0.08 170.12,67.12 92.18,67.12 92.16,67.14 92.14,67.16 92.12,67.18 92.12,111.12 66.08,111.12 66.08,110.18 66.06,110.16 66.04,110.14 66.02,110.12 21.98,110.12 21.96,110.14 21.94,110.16 21.92,110.18 21.92,111.12 0.08,111.12 0.08,66.28 6.02,66.28 6.04,66.26 6.06,66.24 6.08,66.22 6.08,47.98
  pour Bottom: 6.06,47.96 6.04,47.94 6.02,47.92 0.08,47.92 0.08,0.08 76.92,0.08 76.92,10.02 76.94,10.04 76.96,10.06 76.98,10.08 95.22,10.08 95.24,10.06 95.26,10.04 95.28,10.02 95.28,0.08 170.12,0.08 170.12,67.12 92.18,67.12 92.16,67.14 92.14,67.16 92.12,67.18 92.12,111.12 66.08,111.12 66.08,110.18 66.06,110.16 66.04,110.14 66.02,110.12 21.98,110.12 21.96,110.14 21.94,110.16 21.92,110.18 21.92,111.12 0.08,111.12 0.08,66.28 6.02,66.28 6.04,66.26 6.06,66.24 6.08,66.22 6.08,47.98
GPIO8
  Top 0.15: R1.1 22.85,37.26 22.85,43.28 18.97,47.16 18.97,48.34 U2.10
I2C_PW  (via drill 0.3)
  Top 0.15: C2.1 155.4,13.43 157.06,13.43 C1.1 157.13,13.43 158.72,13.43 R2-PINH.2 158.79,13.43 160.45,13.43 R1_PINH.2 160.45,13.5 161.15,14.2 161.15,15.93 159.76,17.31 SENSOR2.8 159.69,17.38 159.48,17.38 158.72,18.14 158.72,18.21 | 158.72,18.21 156.85,18.21 SENSOR2.2 156.78,18.21 155.67,18.21 125.76,48.13 81.23,48.13 81.09,47.99 v79.71,47.99 | 158.72,18.21 159.48,18.97 159.69,18.97 SENSOR2.6 | v77.6,49.1 37.12,49.1 21.54,64.68 21.54,65.79 U2.17
  Bottom 0.15: v79.71,47.99 78.71,47.99 v77.6,49.1
INT_RTC  (via drill 0.3)
  Top 0.15: 81.02,64 81.02,60.8 U3.3 | 81.02,64 81.02,64.96 81.02,65.58 R1-PINH1.1 | v16.41,35.32 16.41,48.34 U2.8 16.41,48.41 16.41,51.87 22.23,57.69 v22.23,61.42 | v17.52,34.21 17.52,33.59 18.56,32.55 18.56,13.99 TP15.TP | v24.72,63.92 25.76,64.96 80,64.96 80.07,64.96 81.02,64
  Bottom 0.15: v17.52,34.21 v16.41,35.32 | v22.23,61.42 v24.72,63.92
IO/BOOT  (via drill 0.3)
  Top 0.15: C6.1 65.86,108.93 65.79,108.86 BOOT_BUTTON.3 65.72,108.86 62.26,108.86 BOOT_BUTTON.4 62.19,108.86 60.39,108.86 R_BOOT.1 60.39,108.79 59.76,108.79 v59.55,108.58 | v47.96,97.99 39.54,97.99 24.03,82.48 24.03,65.86 U2.15
  Bottom 0.15: v59.55,108.58 58.55,108.58 v47.96,97.99
IO/CHANGE  (via drill 0.3)
  Top 0.15: R_CHANGE.1 20.5,108.86 22.16,108.86 22.23,108.93 CHANGE_BUTTON.4 22.3,109 25.69,109 CHANGE_BUTTON.3 25.76,109 27.21,107.55 27.35,107.55 C10.1 27.42,107.48 27.56,107.34 v27.56,106.78 | U2.23 13.85,70.77 15.37,72.3 15.37,74.65 33.03,92.31 v33.03,101.31
  Bottom 0.15: v27.56,106.78 v33.03,101.31
MISO  (via drill 0.3)
  Top 0.15: R8.1 25,95.29 23.13,95.29 22.44,94.6 21.12,94.6 20.43,95.29 D12.2 20.36,95.36 19.94,95.77 8.52,95.77 | v4.09,93.69 5.19,93.69 J4.P7 | 8.52,95.77 v6.58,95.77 | v7.06,61.92 6.79,61.64 6.79,44.94 9.56,42.17 9.56,35.73 10.04,35.25 10.87,35.25 11.77,34.35 11.77,33.86 U1.2 | v9.32,64.18 9.32,65.29 U2.27 8.73,65.86 8.73,66.13 6.92,67.93 v6.92,71.05 | v9.32,64.18 | v5.61,73.27 5.54,73.27 5.33,73.06 5.33,72.99 4.64,72.3 TP6.TP | v8.52,90.44 8.52,95.77 | v7.69,89.61 7.69,78.74 v9.35,77.08
  Bottom 0.15: v4.09,93.69 4.5,93.69 v6.58,95.77 | v9.32,64.18 v7.06,61.92 | v6.92,71.05 5.61,72.37 v5.61,73.27 5.61,73.34 v9.35,77.08 | v7.69,89.61 v8.52,90.44
MOSI  (via drill 0.3)
  Top 0.15: v4.09,89.33 5.19,89.33 J4.P3 | v6.51,90.37 7.55,90.37 8.24,89.68 20.22,89.68 20.36,89.82 D11.2 20.43,89.82 21.12,89.12 22.44,89.12 23.13,89.82 25,89.82 R7.1 25,89.75 25,88.29 25.62,87.67 v25.62,85.52 | v86.01,15.65 85.66,15.65 85.32,15.3 85.32,14.96 J1.14 | v87.53,14.13 87.32,14.13 85.59,12.4 80.75,12.4 80.47,12.67 79.92,12.67 79.22,13.37 79.22,13.78 78.88,14.13 24.03,14.13 22.64,12.74 17.04,12.74 15.86,13.92 TP7.TP 15.79,13.99 10.11,19.67 10.11,34.35 10.39,34.62 v10.87,34.62 | v11.84,35.59 14.54,35.59 14.82,35.87 14.82,39.47 14.4,39.89 14.4,41.55 U1.5 14.4,41.62 14.4,47.37 15.1,48.06 15.1,48.34 U2.7 15.17,48.41 15.17,51.04 20.36,56.23 v20.36,61.49 | v26.66,84.48 26.66,66.97 24.24,64.54 23.41,64.54 v23.34,64.47
  Bottom 0.15: v4.09,89.33 5.47,89.33 v6.51,90.37 | v87.53,14.13 v86.01,15.65 | v10.87,34.62 v11.84,35.59 | v26.66,84.48 v25.62,85.52 | v20.36,61.49 v23.34,64.47
N$1  (via drill 0.3)
  Top 0.15: v160.73,49.03 160.04,49.03 R2-USB1.2 | v161.84,49.44 161.84,49.72 163.22,51.11 163.22,51.66 163.91,52.35 163.91,52.84 164.12,53.05 164.68,53.05 J2.A5
  Bottom 0.15: v160.73,49.03 161.42,49.03 v161.84,49.44
N$2
  Top 0.15: D2.1 149.03,60.66 145.56,60.66 C1_BAT1.1 145.49,60.59 141.75,60.59 141.48,60.32 Q1.2 141.41,60.25 137.95,60.25 137.6,59.9 IC4.1 137.53,59.9 137.12,60.32 137.05,60.32 136.91,60.45 136.91,61.22 137.53,61.84 IC4.3
N$3
  Top 0.15: IC1.5 50.28,101.04 51.94,101.04 C_DELAY.1
N$5
  Top 0.15: C4.1 82.27,34.97 80.54,34.97 79.92,34.35 D3.2 79.92,34.28 79.92,29.36 D4.1
N$6  (via drill 0.3)
  Top 0.15: v130.61,57.55 130.54,57.62 129.84,57.62 R1_BAT.2 | v130.47,56.44 130.19,56.44 129.77,56.02 MCP73831.1
  Bottom 0.15: v130.61,57.55 130.61,56.58 v130.47,56.44
N$7  (via drill 0.3)
  Top 0.15: v127.42,59.76 126.59,59.76 CHG_LED.C | v128.18,60.52 129.77,58.93 R1_BAT.1
  Bottom 0.15: v128.18,60.52 v127.42,59.76
N$8
  Top 0.15: R2_BAT.2 129.84,50.9 129.84,53.32 129.77,53.39 MCP73831.5
N$9  (via drill 0.3)
  Top 0.15: v161.21,54.08 160.11,54.08 R2-USB.1 | v161.98,54.85 162.81,54.85 163.98,56.02 164.68,56.02 J2.B5
  Bottom 0.15: v161.98,54.85 v161.21,54.08
N$10
  Top 0.15: J1.4 90.23,14.96 90.23,23.55 89.4,24.38 EPD_C1.2
N$11
  Top 0.15: J1.5 89.75,14.96 89.75,22.58 87.95,24.38 EPD_C2.2
N$17
  Top 0.15: R_CAPACITOR.2 87.19,50.9 87.19,64.96 86.91,65.23 86.91,65.65 86.77,65.79 D7.1
N$20
  Top 0.15: J1.18 83.31,14.96 83.31,22.71 84.97,24.38 EPD_C6.2
N$21
  Top 0.15: J1.19 82.82,14.96 82.82,23.75 83.45,24.38 EPD_C7.2
N$22
  Top 0.15: J1.20 82.27,14.96 82.27,24.17 82.06,24.38 EPD_C8.2
N$24
  Top 0.15: J1.22 81.23,14.96 81.23,22.23 79.08,24.38 EPD_C10.2
N$26
  Top 0.15: J1.24 80.26,14.96 80.26,20.22 76.11,24.38 EPD_C12.2
PREVGH
  Top 0.15: J1.21 81.78,14.96 81.78,23.13 80.54,24.38 EPD_C9.2 80.68,24.31 81.37,25 82.41,25 82.68,25.28 82.68,26.04 85.94,29.29 D5.1
PREVGL
  Top 0.15: J1.23 80.75,14.96 80.75,21.26 77.63,24.38 EPD_C11.2 77.56,24.45 76.87,25.14 76.87,26.11 76.38,26.59 76.38,29.29 D4.2
RESE
  Top 0.15: J1.3 90.79,14.96 90.79,23.41 90.23,23.96 90.23,25.07 90.86,25.69 R3.2 90.86,25.76 90.86,27.98 Q3.2
RESE'
  Top 0.15: R3.1 90.92,24.45 91.48,24.45 92.73,25.69 R2.2 92.73,25.62 95.15,25.62 SJ1.2
RESET  (via drill 0.3)
  Top 0.15: C5.1 52.35,109 50.76,109 RESET_BUTTON.3 50.69,109 47.3,109 RESET_BUTTON.4 47.23,108.93 46.47,108.93 46.05,108.52 | v47.85,101.8 47.51,101.45 47.51,101.04 IC1.1 | 46.05,108.52 45.91,108.65 45.43,108.65 45.36,108.72 R_RESET.1 | 46.05,108.52 v46.12,108.44 | v12.74,64.4 10.04,61.7 10.04,48.41 U2.3 | v16.07,67.73 16.07,70.01 23.75,77.7 23.75,82.61 41.41,100.27 v46.26,100.27
  Bottom 0.15: v46.12,108.44 47.92,106.64 47.92,101.87 v47.85,101.8 47.78,101.8 v46.26,100.27 | v16.07,67.73 v12.74,64.4
RTC_RST
  Top 0.15: U2.16 22.78,65.79 22.78,64.4 23.75,63.43 25.07,63.43 26.32,64.68 76.17,64.68 79.71,61.15 79.71,60.8 U3.4
RX
  Top 0.15: U2.24 12.6,65.86 12.6,71.26 13.57,72.23 TP2.TP
SCK  (via drill 0.3)
  Top 0.15: v4.09,91.48 4.16,91.55 5.19,91.55 J4.P5 | v6.86,91.48 8.38,89.96 12.81,89.96 15.44,92.59 20.36,92.59 D10.2 20.43,92.66 21.05,93.28 22.51,93.28 23.2,92.59 25,92.59 R6.1 25.07,92.52 25.07,90.92 25.76,90.23 25.76,88.16 v25.83,88.09 | v79.78,14.68 79.78,14.54 80.05,14.27 85.52,14.27 85.73,14.47 85.73,14.89 J1.13 | v78.74,13.64 23.96,13.64 22.78,12.46 14.61,12.46 13.16,13.92 TP8.TP 13.09,13.99 9.07,18 v9.07,38.3 | v10.53,39.75 10.94,39.75 12.74,41.55 13.02,41.55 U1.6 13.09,41.62 13.09,47.37 13.85,48.13 U2.6 13.85,50.14 15.1,51.38 15.1,56.85 20.22,61.98 v21.68,61.98 | v28.05,85.87 28.05,67.93 24.17,64.06 v23.75,64.06
  Bottom 0.15: v6.86,91.48 v4.09,91.48 | v78.74,13.64 v79.78,14.68 | v9.07,38.3 v10.53,39.75 | v28.05,85.87 v25.83,88.09 | v21.68,61.98 v23.75,64.06
SCL  (via drill 0.3)
  Top 0.15: v121.26,52.28 121.12,52.28 121.05,52.35 121.05,52.56 120.91,52.7 120.91,52.98 U4.7 | v126.52,47.99 128.6,47.99 156.78,19.8 SENSOR2.4 156.85,19.8 157.34,20.29 160.24,20.29 161.42,19.11 161.42,13.23 | 161.42,13.23 161.01,12.81 154.84,12.81 154.7,12.95 154.7,13.85 154.84,13.99 157.47,13.99 158.17,14.68 158.72,14.68 R2-PINH.1 | J3.4 165.58,20.77 165.85,20.77 166.89,19.74 166.89,11.84 166.13,11.08 163.64,11.08 161.49,13.23 161.42,13.23 | v82.96,50.14 82.96,50.34 83.52,50.9 83.52,51.45 U3.16 | U2.20 17.73,65.79 17.73,65.51 18.91,64.33 20.77,64.33 48.61,36.49 78.32,36.49 79.22,37.4 79.22,38.5 81.37,40.65 v81.37,47.64 v125.55,47.64
  Bottom 0.15: v121.26,52.28 121.39,52.42 122.09,52.42 126.21,48.3 | v126.52,47.99 126.21,48.3 | v81.37,47.64 82.96,49.24 v82.96,50.14 | v125.55,47.64 126.21,48.3
SDA  (via drill 0.3)
  Top 0.15: v23.55,66.97 19.8,66.97 18.97,66.13 18.97,65.86 U2.19 | v26.59,63.92 68.53,63.92 v77.6,54.85 | v81.65,52.63 81.65,52.42 81.78,52.28 81.99,52.28 82.27,52.01 82.27,51.52 U3.15 | R1_PINH.1 160.45,14.75 159.07,16.13 155.13,16.13 | J3.3 165.51,19.8 165.23,19.8 164.61,20.43 164.61,21.19 164.75,21.33 166.27,21.33 167.17,20.43 167.17,11.7 166.27,10.8 156.44,10.8 154.43,12.81 154.43,15.89 154.67,16.13 155.13,16.13 | v121.95,52.91 121.81,53.05 121.39,53.05 U4.8 | v127.63,47.51 128.04,47.51 156.5,19.04 156.78,19.04 SENSOR2.3 156.3,19.18 v155.81,18.7 | v154.19,17.07 155.13,16.13 | v86.74,47.16 126.1,47.16 v126.24,47.02
  Bottom 0.15: v26.59,63.92 v23.55,66.97 | v77.6,54.85 79.43,54.85 v81.65,52.63 81.65,52.25 v86.74,47.16 | v121.95,52.91 122.16,52.7 122.43,52.7 127.18,47.96 | v127.63,47.51 127.18,47.96 | v155.81,18.7 v154.19,17.07 | 127.18,47.96 v126.24,47.02
SRC
  Top 0.15: D5.2 82.41,29.36 82.34,29.43 82.34,33.73 C4.2 82.34,33.79 82.34,34 82.96,34.62 82.96,35.46 81.92,36.49 80.05,36.49 79.5,37.05 79.5,38.09 83.45,42.03 86.91,42.03 92.17,36.77 92.17,35.59 L1.1 92.17,35.52 92.17,35.04 88.29,31.16 88.29,28.95 88.5,28.74 92.86,28.74 Q3.3
SS_SD  (via drill 0.3)
  Top 0.15: R10.1 25,87.12 23.2,87.12 22.51,87.81 21.05,87.81 20.43,87.19 D8.2 20.36,87.12 12.12,78.88 12.12,76.59 12.12,76 | v12.74,63.78 11.36,62.39 11.36,48.41 U2.4 | 12.12,76 v12.12,66.97 | v4.5,88.22 5.61,88.22 J4.P2 | v6.86,85.87 6.86,78.94 9.21,76.59 11,76.59 11.53,76.59 12.12,76
  Bottom 0.15: v12.74,63.78 12.12,64.4 v12.12,66.97 | v6.86,85.87 v4.5,88.22
TX
  Top 0.15: U2.25 11.29,65.86 11.29,71.61 10.66,72.23 TP1.TP
USB_D+_N  (via drill 0.35)
  Top 0.15: D1.6 157.05,50.58 156.41,51.22 v155,51.22 | U2.13 22.74,47.37 v24.55,45.55
  Bottom 0.15: v155,51.22 154.22,51.22 147.92,44.92 25.69,44.92 25.61,45 25.11,45 v24.55,45.55
USB_D+_P  (via drill 0.35)
  Top 0.15: D1.4 157.05,52.48 156.41,51.84 v155,51.84 | U2.14 24.01,46.99 v25,46
  Bottom 0.15: v155,51.84 154.45,51.84 147.8,45.2 25.8,45.2 v25,46
VBAT
  Top 0.3: U4.2 120.84,55.05 120.43,55.05 U4.3 120.36,55.19 120.36,56.72 118.76,58.31 118.76,59.28 | 127.83,56.99 127.83,56.02 MCP73831.3 | 127.83,56.99 127.83,57.62 C2_BAT.1 127.91,57.76 128.53,58.38 128.53,59.42 127.42,60.52 120.01,60.52 118.76,59.28 | 127.83,56.99 135.87,56.99 138.22,59.35 139.33,59.35 Q1.3 | TP3.TP 89.89,79.78 89.89,68.97 99.51,59.35 118.62,59.35 118.76,59.28
VBUS
  Top 0.3: MCP73831.4 127.83,53.46 126.59,54.71 126.59,58.24 CHG_LED.A 126.45,58.38 126.1,58.72 120.15,58.72 TP14.TP | C1_BAT.1 127.91,50.97 127.91,53.25 MCP73831.4 | D1.2 160.38,51.59 160.04,51.59 159.41,52.22 159.41,55.05 155.81,58.66 PFMF.050.1.2 155.67,58.66 153.74,58.66 C4_USB.1 153.6,58.66 151.59,58.66 C5_USB.1 151.45,58.66 149.09,58.66 D2.2 148.96,58.59 148.75,58.38 143.69,58.38 R1_PWRUSB.2 143.56,58.31 141.55,58.31 141.48,58.38 Q1.1 141.34,58.31 139.54,56.51 131.57,56.51 128.6,53.53 127.97,53.53 MCP73831.4
VRTC
  Top 0.3: C10_SUPERCAP.2 89.68,49.58 87.19,49.58 R_CAPACITOR.1 87.05,49.65 86.39,49.65 85.97,50.07 83.86,50.07 83.24,49.44 C8.1 83.1,49.38 82.68,49.38 81.02,51.04 81.02,51.45 U3.14
VUSB
  Top 0.3: J2.A4 164.68,51.8 164.68,52.01 J2.B9 164.81,52.08 165.37,52.08 165.58,52.28 165.58,56.3 165.37,56.51 164.81,56.51 J2.B4 164.68,56.58 164.68,56.78 J2.A9 164.54,56.85 162.11,56.85 160.31,58.66 PFMF.050.1.1